# EAGLE board fuzz-bass (EAGLE 9.6.1)
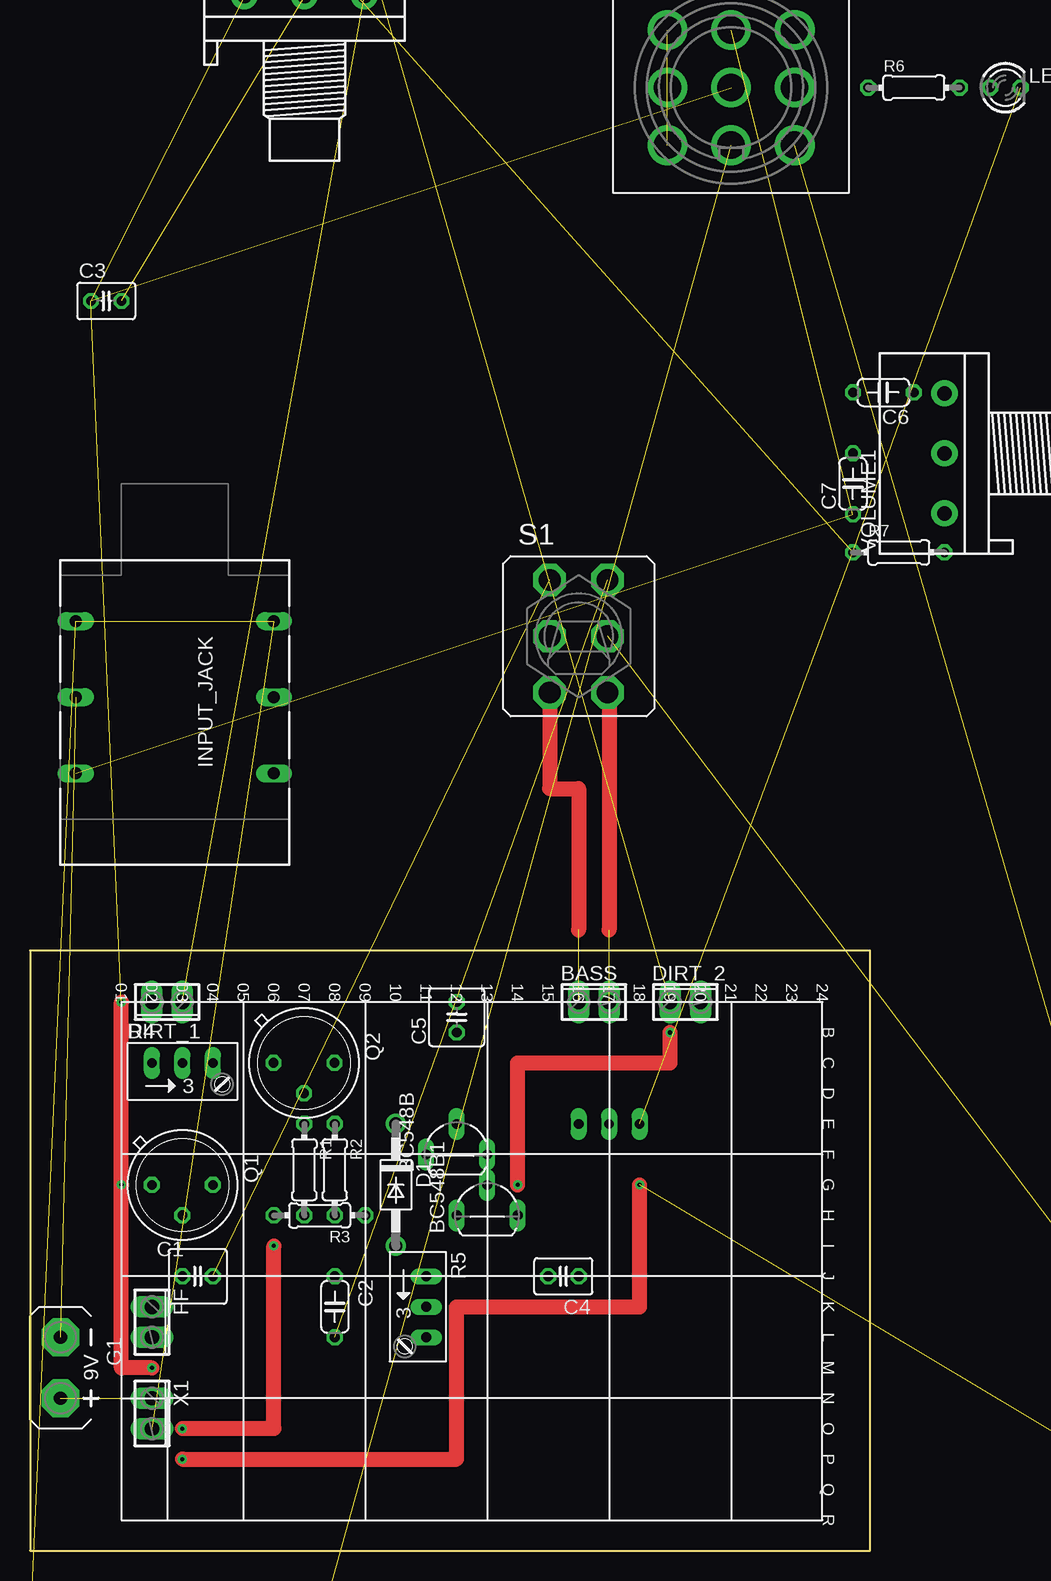
[diagram p0: board, top side]
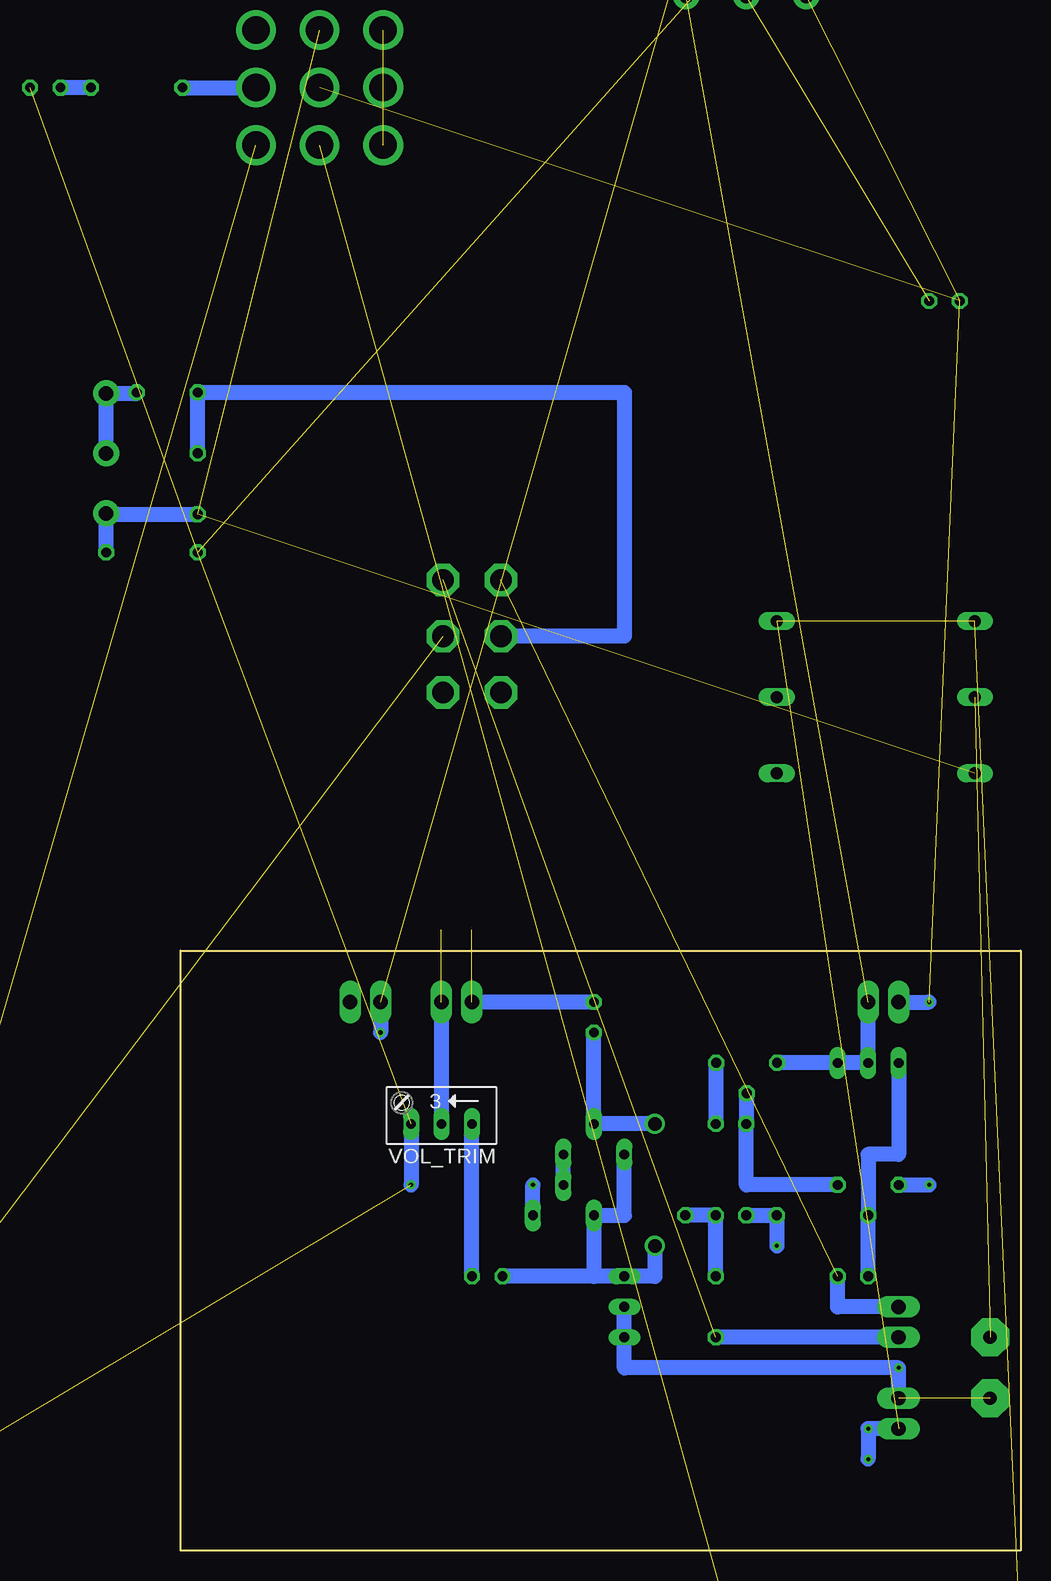
[diagram p1: board, bottom side, seen from below]

Size 70 x 50 mm. Coordinates in mm from the lower left corner, seen from the top.
Outline: 0,0 70,0 70,50 0,50 0,0
Copper layers (1*16): Top 0.035mm / dielectric 0.15mm / Bottom 0.035mm
Design rules "default": minimum track width 6mil, minimum drill 0.35mm, track to track 6mil, track to pad 6mil, pad to pad 6mil, via to via 6mil, smd to smd 6mil, copper to edge 40mil, drill to drill 6mil, minimum pad ring 10mil, minimum via ring 8mil, stop-mask expansion 4mil, vias tented up to drill 0mil, thermal gap 10mil

## Footprints (pad centres in the part's own frame; a part is rotated, then mirrored left to right if it is on the bottom)
2POL254 = drill 1.2 long: 1 -1.27,0; 2 1.27,0
TO92L = drill 0.813 long: 1 0,-2.54; 2 2.54,0; 3 0,2.54
C025-050X050 = drill 0.813 octagon: 1 -1.27,0; 2 1.27,0
C050-024X044 = drill 0.813 octagon: 1 -2.54,0; 2 2.54,0
C025-030X050 = drill 0.813 octagon: 1 -1.27,0; 2 1.27,0
DO41-10 = drill 1.118: A 5.08,0; C -5.08,0
3RP/1610G = drill 1.2 pad 2.184: 1-1 -5,0; 1-2 0,0; 1-3 5,0; 2-1 -5,5; 2-2 0,5; 2-3 5,5
AB9V = drill 1.118 pad 3.15 octagon: + 0,2.54; - 0,-2.54
JACK6.35MM = drill 1 long: 0 -6.35,-8.89; 1 0,-8.89; 2 6.35,-8.89; 3 -6.35,7.62; 4 0,7.62; 5 6.35,7.62
DCJ0303 = drill 1 pad 2 long: 1 0,3.1; 2 4.8,0; 3 0,-3
LED3MM = drill 0.813 octagon: A -1.27,0; K 1.27,0
TO5 = drill 0.813 octagon: 1 0,-2.54; 2 2.54,0; 3 0,2.54
0204/7 = drill 0.813 octagon: 1 -3.81,0; 2 3.81,0
RJ9W = drill 0.813 long: A 2.54,0.635; E -2.54,0.635; S 0,0.635
M9040P2 = drill 1.803 octagon: 1 -2.413,4.699; 2 -2.413,0; 3 -2.413,-4.699; 4 2.413,4.699; 5 2.413,0; 6 2.413,-4.699
3PDT = drill 2.3 pad 3.1: 1 -5.3,4.8; 2 0,4.8; 3 5.3,4.8; 4 -5.3,0; 5 0,0; 6 5.3,0; 7 -5.3,-4.8; 8 0,-4.8; 9 5.3,-4.8
3RP/1610N = drill 1.2 pad 2.184: 1 -5,0; 2 0,0; 3 5,0

## Placement (x,y rotation side)
BASS  [2POL254]  46.99,45.72 0 top
BC548B  [TO92L]  35.56,33.02 90 top
BC548B1  [TO92L]  38.1,27.94 90 top
C1  2.2u  [C025-050X050]  13.97,22.86 0 top
C2  0.1u  [C050-024X044]  25.4,20.32 270 top
C3  20u  [C025-030X050]  6.35,104.14 0 top  (outside the outline)
C4  20u  [C025-030X050]  44.45,22.86 180 top
C5  0.22u  [C025-050X050]  35.56,44.45 90 top
C6  0.22u  [C050-024X044]  71.12,96.52 180 top  (outside the outline)
C7  0.001u  [C050-024X044]  68.58,88.9 90 top  (outside the outline)
D1  1N4942  [DO41-10]  30.48,30.48 270 top
DIRT  1k  [3RP/1610G]  22.86,129.54 0 top  (outside the outline)
DIRT_1  [2POL254]  11.43,45.72 180 top
DIRT_2  [2POL254]  54.61,45.72 0 top
FF  [2POL254]  10.16,19.05 270 top
G1  AB9V  [AB9V]  2.54,15.24 180 top
INPUT_JACK  JACK6.35MM  [JACK6.35MM]  12.7,71.12 270 top  (outside the outline)
J1  [DCJ0303]  -10.16,12.7 0 top  (outside the outline)
LED1  [LED3MM]  81.28,121.92 0 top  (outside the outline)
OUTPUT_JACK1  JACK6.35MM  [JACK6.35MM]  5.08,-43.18 0 top  (outside the outline)
Q1  2N4036  [TO5]  12.7,30.48 270 top
Q2  2N4036  [TO5]  22.83,40.65 270 top
R1  33k  [0204/7]  22.86,31.75 270 top
R2  8.2k  [0204/7]  25.4,31.75 270 top
R3  470  [0204/7]  24.13,27.94 180 top
R4  200k  [RJ9W]  12.7,40.01 0 top
R5  200k  [RJ9W]  32.38,20.32 270 top
R6  100k  [0204/7]  73.66,121.92 0 top  (outside the outline)
R7  1M  [0204/7]  72.39,83.19 0 top  (outside the outline)
S1  [M9040P2]  45.72,76.2 0 top  (outside the outline)
S3  3PDT  [3PDT]  58.42,121.92 0 top  (outside the outline)
VOL_TRIM  100k  [RJ9W]  48.26,36.2 180 bottom
VOLUME  500k  [3RP/1610N]  95.25,8.89 90 top  (outside the outline)
VOLUME1  500k  [3RP/1610N]  76.2,91.44 90 top  (outside the outline)
X1  [2POL254]  10.16,11.43 270 top

## Library data of the parts
BASS DIRT_1 DIRT_2 FF X1 = con-phoenix-254; OC_FARNELL: unknown; OC_NEWARK: unknown
BC548B BC548B1 = transistor
C1 C5 = adafruit
C2-C4 C6 C7 = rcl; SPICEPREFIX: C
D1 = diode
DIRT R4 R5 VOL_TRIM VOLUME VOLUME1 = pot
G1 = battery
INPUT_JACK OUTPUT_JACK1 = jack-eagle
J1 = con-jack; OC_FARNELL: unknown; OC_NEWARK: unknown
LED1 = led
Q1 Q2 = transistor-pnp
R1-R3 R6 R7 = rcl; SPICEPREFIX: R
S1 S3 = switch

## Nets
+9V: C3.1 DIRT.1-1 DIRT_1.2 G1.+ Q1.1 R5.A R5.S S3.5 X1.1
BASS_DIRT_IN: BC548B1.1 DIRT.2-3 DIRT_2.1
BASS_IN: BASS.1 C5.2 S1.3
BASS_OUT: BASS.2 S1.6 VOL_TRIM.S
FACE_DIRT_IN: DIRT.1-3 DIRT_1.1 Q2.1 R4.A R4.S
FUZZ_FACE_IN: C1.2 FF.1 S1.1
FUZZ_FACE_OUT: C2.2 FF.2 S1.4
FUZZED_OUTPUT: S3.9 VOLUME.2
GND: DIRT.2-1 DIRT.2-2 INPUT_JACK.0 INPUT_JACK.3 LED1.K OUTPUT_JACK1.0 OUTPUT_JACK1.3 R1.2 R3.2 R7.1 VOL_TRIM.A VOLUME.1 X1.2
INPUT: C7.1 INPUT_JACK.2 R7.2 S3.2 VOLUME1.1
N$1: Q2.3 R2.1
N$3: C1.1 Q1.2 R4.E
N$4: Q1.3 Q2.2 R1.1
N$5: C3.2 DIRT.1-2
N$6: C2.1 R2.2 R3.1
N$7: BC548B1.2 BC548B.1
N$8: BC548B1.3 BC548B.3 C4.2 D1.A R5.E
N$9: R6.1 S3.6
N$10: LED1.A R6.2
N$11: BC548B.2 C5.1 D1.C
N$12: C4.1 VOL_TRIM.E
N$13: C6.1 VOLUME1.2 VOLUME1.3
N$14: S3.1 S3.7
N$15: G1.- INPUT_JACK.1
N$16: S1.5 VOLUME.3
OUTPUT: OUTPUT_JACK1.2 S3.8
TONE_INPUT: S3.3
TONE_OUTPUT: C6.2 C7.2 S1.2

## Tracks (layer width: path | path; a pad name or v marks a point on that pad's centre or on a via)
+9V  (via drill 0.35)  (4 unrouted)
  Top 1.27: v10.16,15.24 7.62,15.24 v7.62,30.48 v7.62,45.72
  Bottom 1.27: X1.1 v10.16,15.24 33.02,15.24 R5.A R5.S | Q1.1 v7.62,30.48 | DIRT_1.2 v7.62,45.72
BASS_DIRT_IN  (via drill 0.35)  (1 unrouted)
  Top 1.27: v40.64,30.48 40.64,40.64 53.34,40.64 v53.34,43.18
  Bottom 1.27: BC548B1.1 v40.64,30.48 | DIRT_2.1 v53.34,43.18
BASS_IN  (1 unrouted)
  Top 1.27: S1.3 43.31,63.5 45.72,63.5 45.72,51.73
  Bottom 1.27: C5.2 BASS.1
BASS_OUT  (1 unrouted)
  Top 1.27: S1.6 48.26,71.5 48.26,51.73
  Bottom 1.27: BASS.2 VOL_TRIM.S
FACE_DIRT_IN  (1 unrouted)
  Bottom 1.27: DIRT_1.1 R4.S R4.A 15.25,40.65 Q2.1
FUZZ_FACE_IN  (1 unrouted)
  Bottom 1.27: FF.1 15.24,20.32 C1.2
FUZZ_FACE_OUT  (1 unrouted)
  Bottom 1.27: FF.2 C2.2
FUZZED_OUTPUT  (1 unrouted)
GND  (via drill 0.35)  (9 unrouted)
  Top 1.27: v12.7,10.16 20.32,10.16 v20.32,25.4 | v12.7,7.62 35.56,7.62 35.56,20.32 50.8,20.32 v50.8,30.48
  Bottom 1.27: R1.2 R3.2 v20.32,25.4 | X1.2 v12.7,10.16 v12.7,7.62 | VOL_TRIM.A v50.8,30.48
INPUT  (2 unrouted)
  Bottom 1.27: R7.2 VOLUME1.1 76.2,86.36 C7.1
N$1
  Bottom 1.27: Q2.3 25.4,40.62 R2.1
N$3
  Bottom 1.27: R4.E 10.16,33.02 12.7,33.02 Q1.2 C1.1
N$4
  Bottom 1.27: Q2.2 22.86,38.08 R1.1 22.86,30.48 Q1.3
N$5  (1 unrouted)
N$6
  Bottom 1.27: R3.1 R2.2 C2.1
N$7
  Bottom 1.27: BC548B1.2 BC548B.1
N$8
  Bottom 1.27: BC548B.3 33.02,27.94 BC548B1.3 35.56,22.86 | 35.56,22.86 R5.E 30.48,22.86 D1.A | 35.56,22.86 C4.2
N$9
  Bottom 1.27: R6.1 S3.6
N$10
  Bottom 1.27: R6.2 LED1.A
N$11
  Bottom 1.27: C5.1 BC548B.2 D1.C
N$12
  Bottom 1.27: C4.1 VOL_TRIM.E
N$13
  Bottom 1.27: VOLUME1.2 VOLUME1.3 73.66,96.44 C6.1
N$14  (1 unrouted)
N$15  (1 unrouted)
N$16  (1 unrouted)
OUTPUT  (1 unrouted)
TONE_OUTPUT
  Bottom 1.27: C7.2 C6.2 33.02,96.52 33.02,76.2 S1.2

## Text on the board
tPlace: 01 | 02 | 03 | 04 | 05 | 06 | 07 | 08 | 09 | 10 | 11 | 12 | 13 | 14 | 15 | 16 | 17 | 18 | 19 | 20 | 21 | 22 | 23 | 24 | B | C | D | E | F | G | H | I | J | K | L | M | N | O | P | Q | R